# Altium PCB Glucometer-I.C.-Amp Test- V1.PcbDoc
Units mm, origin at the board's own origin, x right, y up, seen from the top; angles counter-clockwise.
Board outline 40.28 x 22.25 mm, 2 copper layers (Top Layer, Bottom Layer); 12 components, 13 nets, 54 pads, 7 vias.
Unrouted connection lines stored in the file: 11.
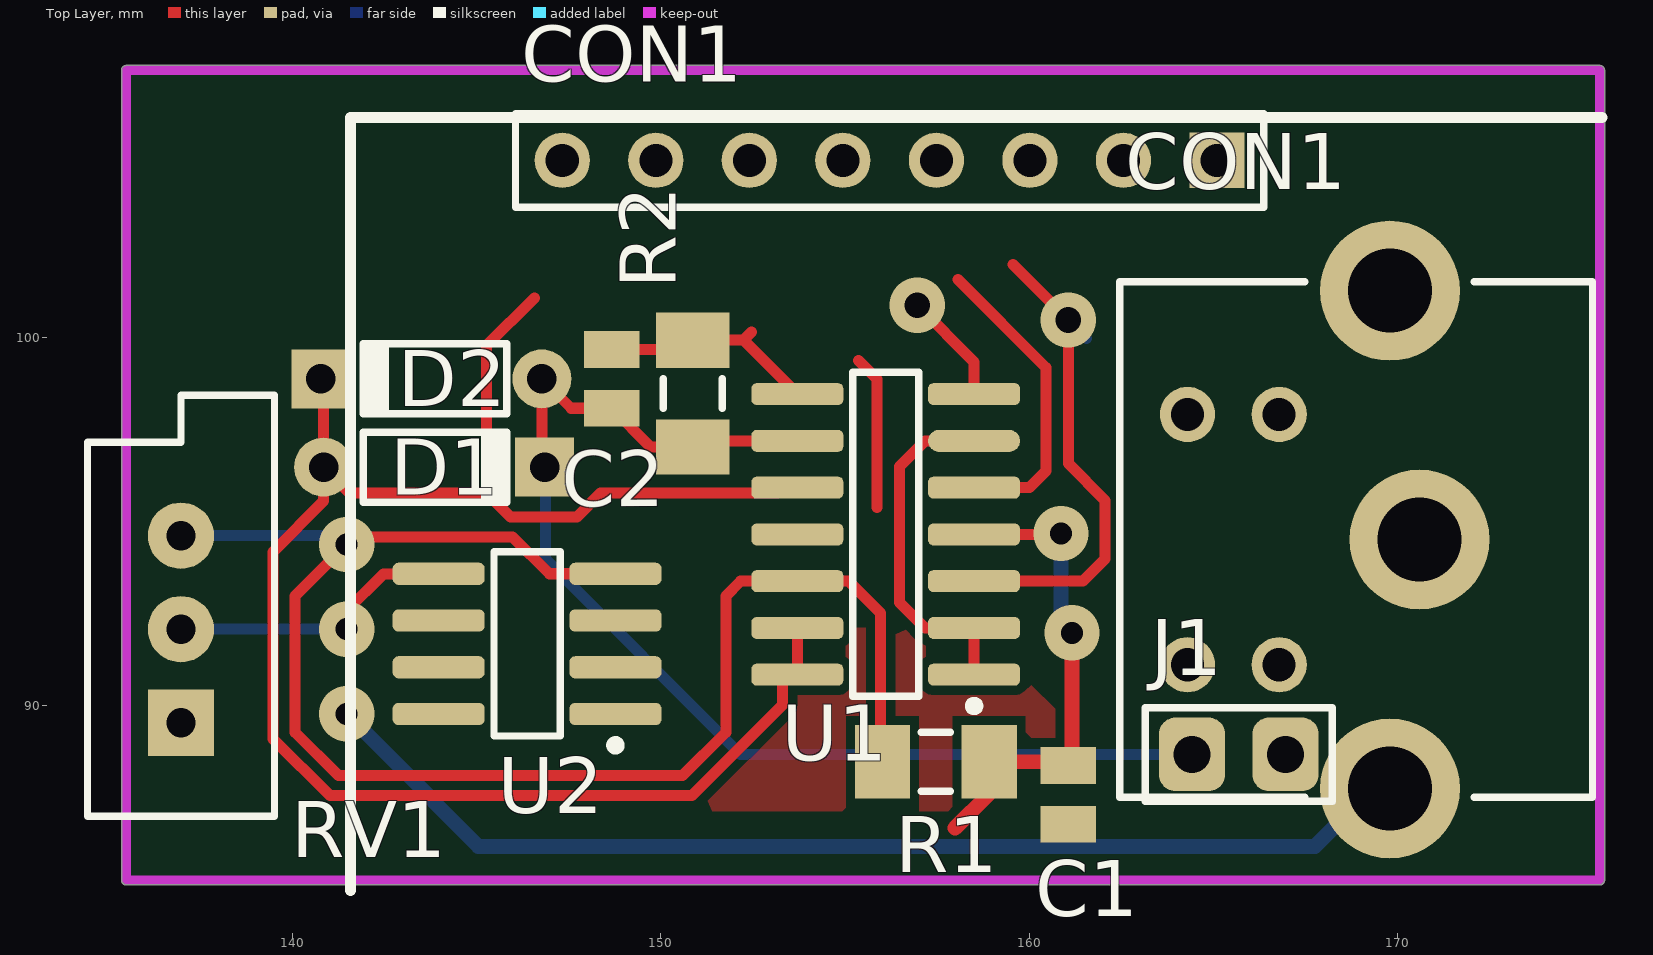
[diagram p0: Top Layer view]
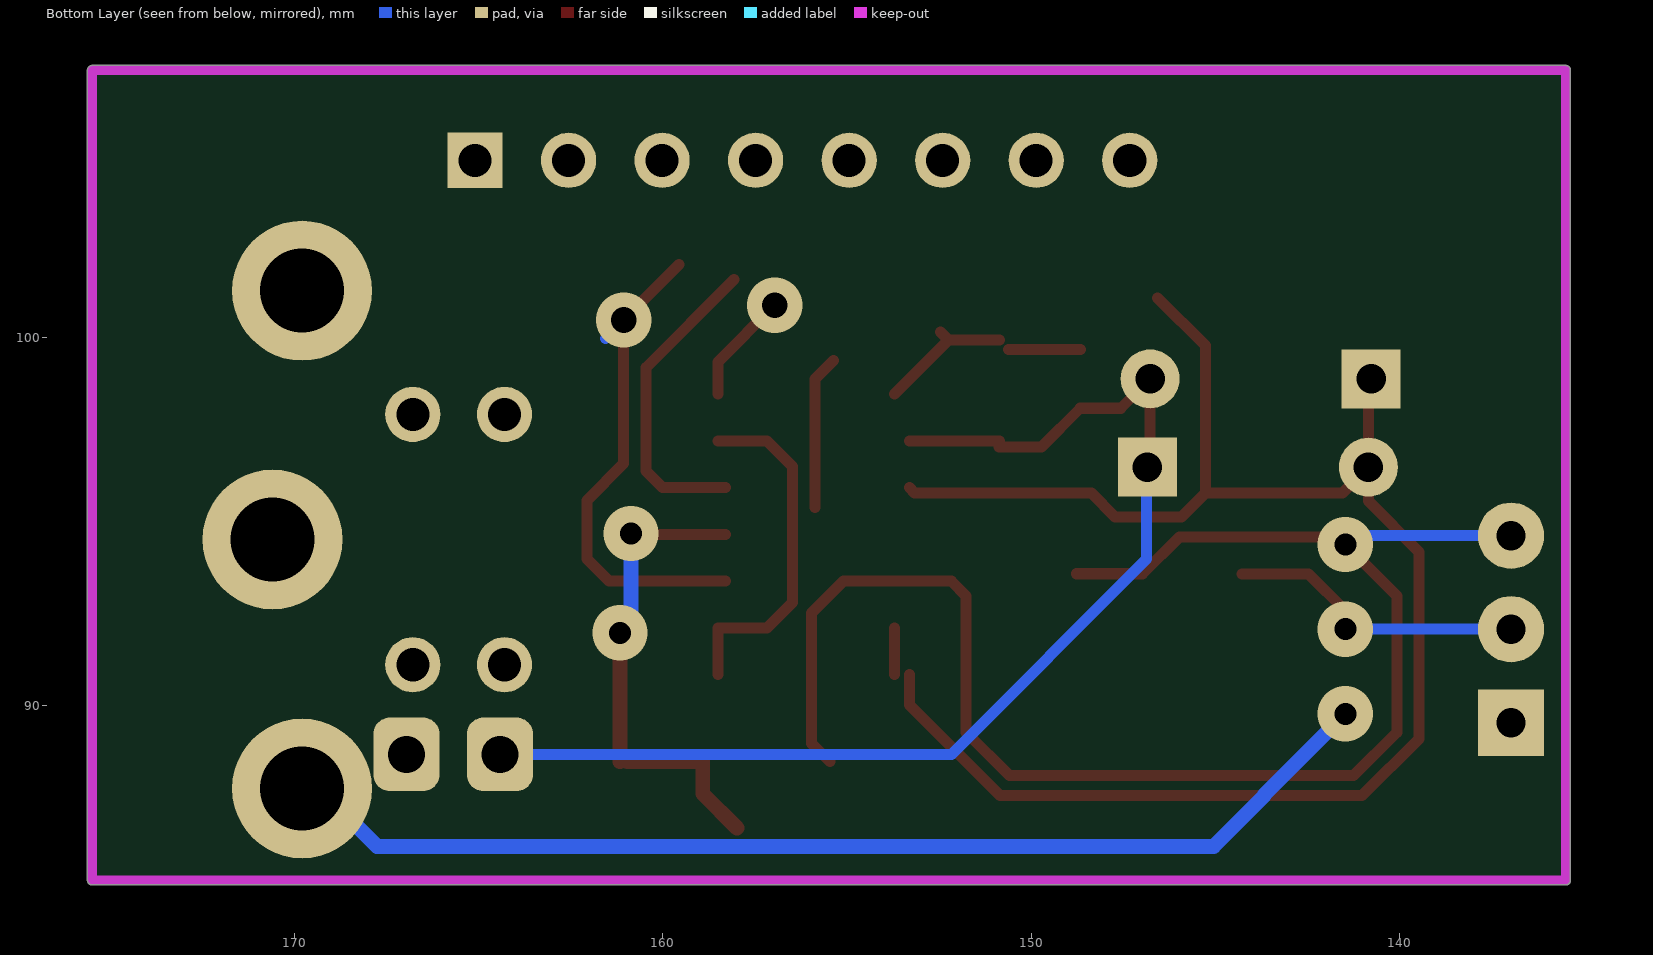
[diagram p1: Bottom Layer view, seen from below]

## Layer stack, top to bottom
Top Layer: signal copper 0.0356
Dielectric: dielectric 0.32, FR-4, Dk 4.8
Bottom Layer: signal copper 0.0356

## Board outline
135.348,85.25 ccw(c135.475,85.25) 135.475,85.123 175.5,85.123 ccw(c175.5,85.25) 175.627,85.25 175.627,107.25 ccw(c175.5,107.25) 175.5,107.377 135.475,107.377 ccw(c135.475,107.25) 135.348,107.25

## Design rules (kind name [scope] priority, off if disabled: settings)
AssemblyTestPointUsage AssemblyTestPointUsage_1 [All] p2:
AssemblyTestpoint AssemblyTestpoint_1 [All] p2: testpointundercomponent=TRUE minsize=1.016 maxsize=2.54 preferedsize=1.524 minholesize=0 maxholesize=1.016 preferedholesize=0.813 testpointgrid=0.025 usegrid=TRUE gridtolerance=0 allowsidetop=TRUE allowsidebottom=TRUE
Clearance [All] p1: gap=0.25
ComponentClearance ComponentClearance_1 [All] p2: gap=0.254 collisioncheckmode=3 verticalgap=0.254 showdistances=FALSE
DiffPairsRouting DiffPairsRouting_1 [All] p2: maxlimit=0.254 minlimit=0.254 mostfreqgap=0.254 maxuncoupledlength=12.7
FabricationTestPointUsage TestPointUsage [All] p2: valid=0 allowmultiple=FALSE
FabricationTestpoint Testpoint [All] p2: side=3 testpointundercomponent=TRUE minsize=1.016 maxsize=2.54 preferedsize=1.524 minholesize=0 maxholesize=1.016 preferedholesize=0.813 testpointgrid=0.025 allowsidetop=TRUE allowsidebottom=TRUE usegrid=TRUE gridtolerance=0
FanoutControl Fanout_LCC [IsLCC] p1: bgadir=Out bgaviamode=Centered fanoutstyle=Auto fanoutdirection=Alternating viagrid=0.025 // Fanout_LCC (Default Rule)
FanoutControl Fanout_BGA [IsBGA] p2: bgadir=Out bgaviamode=Centered fanoutstyle=Auto fanoutdirection=Alternating viagrid=0.025 // Fanout_BGA (Default Rule)
FanoutControl Fanout_Default [All] p4: bgadir=Out bgaviamode=Centered fanoutstyle=Auto fanoutdirection=Alternating viagrid=0.025 // Fanout_Default (Default Rule)
FanoutControl Fanout_Small [(CompPinCount < 5)] p5: bgadir=Out bgaviamode=Centered fanoutstyle=Auto fanoutdirection=OutThenIn viagrid=0.025 // Fanout_Small (Default Rule)
FanoutControl Fanout_BGA_1 [IsBGA] p6: bgadir=Out bgaviamode=Centered fanoutstyle=Auto fanoutdirection=Alternating viagrid=0.025 // Fanout_BGA (Default Rule)
FanoutControl Fanout_LCC_1 [IsLCC] p7: bgadir=Out bgaviamode=Centered fanoutstyle=Auto fanoutdirection=Alternating viagrid=0.025 // Fanout_LCC (Default Rule)
FanoutControl Fanout_SOIC_1 [IsSOIC] p8: bgadir=Out bgaviamode=Centered fanoutstyle=Auto fanoutdirection=Alternating viagrid=0.025 // Fanout_SOIC (Default Rule)
FanoutControl Fanout_Small_1 [(CompPinCount < 5)] p9: bgadir=Out bgaviamode=Centered fanoutstyle=Auto fanoutdirection=OutThenIn viagrid=0.025 // Fanout_Small (Default Rule)
FanoutControl Fanout_Default_1 [All] p10: bgadir=Out bgaviamode=Centered fanoutstyle=Auto fanoutdirection=Alternating viagrid=0.025 // Fanout_Default (Default Rule)
Height Height_1 [All] p2: minheight=0 maxheight=25.4 prefheight=12.7
HoleSize [All] p1: absolutevalues=TRUE maxlimit=5 minlimit=0.025 maxpercent=80.000 minpercent=20.000
HoleSize HoleSize_1 [All] p2: absolutevalues=TRUE maxlimit=5 minlimit=0.025 maxpercent=80.000 minpercent=20.000
HoleToHoleClearance HoleToHoleClearance_1 [All] p2: gap=0.254 allowstackedmicrovias=TRUE
LayerPairs LayerPairs_1 [All] p2: enforce=TRUE
MinimumSolderMaskSliver MinimumSolderMaskSliver_1 [All] p2: minsoldermaskwidth=0.254
NetAntennae NetAntennae_1 [All] p2: netantennaetolerance=0
PasteMaskExpansion PasteMaskExpansion_1 [All] p2: expansion=0
PlaneClearance PlaneClearance_1 [All] p2: clearance=0.508
PolygonConnect [All] p1: connectstyle=Relief reliefconductorwidth=0.254 reliefentries=4 polygonreliefangle="90 Angle" airgapwidth=0.254
PolygonConnect PolygonConnect_1 [All] p2: connectstyle=Relief reliefconductorwidth=0.254 reliefentries=4 polygonreliefangle="90 Angle" airgapwidth=0.254
RoutingPriority RoutingPriority_1 [All] p2: routingpriority=0
RoutingTopology RoutingTopology_1 [All] p2: topology=Shortest
RoutingVias [All] p1: holewidth=0.8 width=1.5 viastyle="Through Hole" minholewidth=0.7 minwidth=1 maxholewidth=1 maxwidth=2
ShortCircuit ShortCircuit_1 [All] p2: allowed=FALSE
SilkToSilkClearance SilkToSilkClearance_1 [All] p2: silktosilkclearance=0.254
SilkToSolderMaskClearance SilkscreenOverComponentPads [IsPad] p2: minsilkscreentomaskgap=0.254 clearancetoexposedcopper=TRUE
SolderMaskExpansion [All] p1: expansion=0.102
SolderMaskExpansion SolderMaskExpansion_1 [All] p2: expansion=0.102
UnRoutedNet UnRoutedNet_1 [All] p2:
Width [All] p1: maxlimit=5 minlimit=0.25 preferedwidth=0.3 minimp=50.000000 maximp=50.000000 favimp=50.000000
23 further rules are at their usual default settings.

## Classes and differential pairs
component class "Glucometer-I.C.-Amp Test- V1": C1 C2 D1 D2 J1 R1 R2 RV1 U1 U2

## Components (designator, comment, footprint, x,y, rotation, side; value= is the part's Value field where it differs from the comment)
C1 "Cap2" CAPC1608N 161.063,87.567 r270 top
C2 "Cap2" CAPC1608N 148.663,98.867 r90 top
CON1 "Header 8" HDR1X8 165.1,104.8 r180 top
CON1 "" CDIN2.6-3H4A 175.3,94.5 r180 top
D1 "1N4148" DO-35#1 143.863,96.467 r0 top
D2 "1N4148" DO-35#2 143.863,98.867 r180 top
J1 "Header 2" HDR1X2 166.963,88.667 r180 top
R1 "Res1" RESC3216N 157.463,88.467 r0 top
R2 "Res1" RESC3216N 150.863,98.467 r270 top
RV1 "RPot" VR5 136.963,92.067 r90 top
U1 "LMC6044IN" M14A_N 156.104,94.641 r180 top
U2 "LM385BM" M08A_N 146.363,91.667 r180 top

## Footprints (in the part's own frame and the unit in brackets; to place one, negate y for a bottom-side part, rotate by r counter-clockwise, add the part's x,y. Pads: shape width x height; smd on the part's side, far side on the other; paste and mask are expansions set on the pad)
CAPC1608N [mm] "Chip Capacitor, Body 1.6x0.8mm, IPC Medium Density"
  rect 1x1.5 smd: 1(-0.8,0) 2(0.8,0)
  body extent -0.87,-0.48 0.87,0.48, height 0.85
CDIN2.6-3H4A [mm] "Connector; Circular DIN, Thru-Hole; 4 Position; Right Angle; Pitch 2.1/2.6 mm; Body 14 x 12.84 x 13 mm (WxTxH), Shielded, Special PCB Retention"
  round 1.5 hole 0.9: 1(8.51,-3.4) 2(8.51,3.4) 3(11,-3.4) 4(11,3.4)
  round 3.8 hole 2.28: MH1(5.5,-6.76) MH2(4.7,0) MH3(5.5,6.76)
  silkscreen extent 0,-7 12.84,7, body extent 0,-7 12.84,7, height 13
DO-35#1 [mm] "Diode, Axial; Body 3.8 x 1.9 mm (LxDia. max), Lead Dia. 0.53 mm (max)"
  round 1.6 hole 0.8: 1(-3.025,0)
  rect 1.6x1.6 hole 0.8: 2(2.975,0)
  silkscreen extent -1.95,-0.95 2.05,0.95
DO-35#2 [mm] "Diode, Axial; Body 3.8 x 1.9 mm (LxDia. max), Lead Dia. 0.53 mm (max)"
  round 1.6 hole 0.8: 1(-2.9,0)
  rect 1.6x1.6 hole 0.8: 2(3.1,0)
  silkscreen extent -1.95,-0.95 2.05,0.95
HDR1X2 [mm] "Connector; Header; 2 Position"
  rrect50% 1.8x2 hole 1: 1(0,0) 2(2.54,0)
  silkscreen extent -1.27,-1.27 3.81,1.27
HDR1X8 [mm] "Connector; Header; 8 Position"
  rect 1.5x1.5 hole 0.9: 1(0,0)
  round 1.5 hole 0.9: 2(2.54,0) 3(5.08,0) 4(7.62,0) 5(10.16,0) 6(12.7,0) 7(15.24,0) 8(17.78,0)
  silkscreen extent -1.27,-1.27 19.05,1.27
M08A_N [mm] "SOIC, 8-Leads, Body 4.9x3.9mm, Pitch 1.27mm, IPC Medium Density"
  rrect50% 2.5x0.6 smd: 1(-2.4,1.905) 2(-2.4,0.635) 3(-2.4,-0.635) 4(-2.4,-1.905) 5(2.4,-1.905) 6(2.4,-0.635) 7(2.4,0.635) 8(2.4,1.905)
  silkscreen extent -2.53,-2.5 0.9,2.88, body extent -2,-2.5 2,2.5, height 1.75
M14A_N [mm] "SOIC, 14-Leads, Body 8.6x3.9mm, Pitch 1.27mm, IPC Medium Density"
  rrect50% 2.5x0.6 smd: 1(-2.4,3.81) 2(-2.4,2.54) 3(-2.4,1.27) 4(-2.4,0) 5(-2.4,-1.27) 7(-2.4,-3.81) 8(2.4,-3.81) 9(2.4,-2.54) 10(2.4,-1.27) 11(2.4,0) 12(2.4,1.27) 13(2.4,2.54) 14(2.4,3.81)
  oval 2.5x0.6 smd: 6(-2.4,-2.54)
  silkscreen extent -2.53,-4.4 0.9,4.78, body extent -2,-4.38 2,4.38, height 1.75
RESC3216N [mm] "Chip Resistor, Body 3.2x1.6mm, IPC Medium Density"
  rect 1.5x2 smd: 1(-1.45,0) 2(1.45,0)
  silkscreen extent -0.4,-0.8 0.4,0.8, body extent -1.68,-0.87 1.68,0.87, height 0.71
VR5 [mm] "Thru-Hole; 3 Leads"
  rect 1.8x1.8 hole 0.8: 1(-2.54,0)
  round 1.8 hole 0.8: 2(0,0) 3(2.54,0)
  silkscreen extent -5.08,-2.54 6.35,2.54

## Part data
C1 C2: "Capacitor"
CON1: "Header, 8-Pin"
CON1: library part "MiniDin 4Pins - SuperVideo", "MiniDin 4 Pins"
D1 D2: "High Conductance Fast Diode"
J1: "Header, 2-Pin"
R1 R2: "Resistor"
RV1: "Potentiometer"
U1: "CMOS Quad Micropower Operational Amplifier, 14-pin MDIP"
U2: "Adjustable Micropower Voltage Reference, 8-pin Narrow SOIC"

## Via types
v1: diameter 1.5, hole 0.6, Top Layer to Bottom Layer, 5 vias
v2: diameter 1.5, hole 0.7, Top Layer to Bottom Layer, 2 vias

## Nets (pads, with @x,y where several pads share a name; then routed paths per layer and width w, separated by ;. In a path a pad name is that pad's centre, name@x,y a point inside that pad or via, vN(x,y) a via of type N, cw(c..) or ccw(c..) an arc to the next point about the centre after c; other vN are vias at no path point)
3.3V: C1.1 R1.2 U1.4 | length 13.8
  Top Layer w0.3: U1.4@158.304,94.641 v1@160.837,94.641
  Top Layer w0.4: 157.986,86.667 158.913,87.594 R1.2 C1.1@160.963,88.467 ; v1@160.837,94.641 v1(160.863,94.667) ; C1.1@161.163,88.467 161.163,91.467 161.663,91.967 v1(161.163,91.967)
  Bottom Layer w0.4: v1(160.863,94.667) 160.863,92.267 v1(161.163,91.967)
CNT: CON1.3@160.02,104.8 CON1.7 U1.7 | length 3.1
  Top Layer w0.3: v2(156.963,100.867) 158.504,99.326 U1.7
GND: C1.2 CON1.8 RV1.1 U1.11 U2.8
NetR1_1: R1.1 RV1.3 U1.12 U2.4 | length 42.7
  Top Layer w0.3: U2.4 146.968,93.572 145.973,94.567 141.663,94.567 v1(141.463,94.367) 140.063,92.967 140.063,89.267 141.236,88.094 150.59,88.094 151.763,89.267 151.763,92.967 152.167,93.371 U1.12 155.099,93.371 155.963,92.507 155.963,88.967 R1.1@155.463,88.467
  Bottom Layer w0.3: RV1.3@137.663,94.607 141.223,94.607 v1(141.463,94.367)
NetRV1_3: RV1.2 U2.5 | length 7.5
  Top Layer w0.3: v1(141.463,92.067) 141.463,92.567 142.463,93.567 U2.5@144.263,93.567
  Bottom Layer w0.3: RV1.2@137.663,92.067 v1(141.463,92.067)
NetU1_1: U1.1 U1.2 U1.6 | length 9.6
  Top Layer w0.3: U1.1 U1.2 157.169,92.101 156.479,92.791 156.479,96.491 157.169,97.181 U1.6
REF: CON1.1@165.1,104.8 CON1.4@157.48,104.8 U1.3 | length 13.7
  Top Layer w0.3: U1.3@158.304,93.371 U1.3 161.467,93.371 162.063,93.967 162.063,95.567 161.063,96.567 v2(161.063,100.467) 159.563,101.967
  Bottom Layer w0.3: v2(161.063,100.467) v2@161.563,99.967
VCC: CON1.5
VCTRL: CON1.6 U1.5 | length 8.5
  Top Layer w0.3: 158.063,101.567 160.463,99.167 160.463,96.367 160.007,95.911 U1.5@158.304,95.911
VGND: D1.1 D2.2 U1.10 U1.13 U1.14 | length 47.1
  Top Layer w0.3: D2.2@140.838,98.792 D1.1 ; 146.563,101.067 145.263,99.767 145.263,95.767 ; U1.14@153.304,90.831 153.304,90.008 150.84,87.544 141.008,87.544 139.463,89.089 139.463,94.167 140.838,95.542 D1.1 ; U1.10@153.304,95.911 153.16,95.767 148.363,95.767 147.713,95.117 145.913,95.117 145.263,95.767 ; U1.14 U1.13 ; D1.1 141.538,95.767 145.263,95.767
VOUT: C2.2 R2.1 U1.8 | length 5.7
  Top Layer w0.3: C2.2 R2.1@150.613,99.667 ; R2.1 152.238,99.917 ; 152.463,100.142 152.238,99.917 ; U1.8 152.238,99.917
WRK: CON1.2 J1.1
WRKIN: C2.1 D1.2 D2.1 J1.2 R2.2 U1.9 | length 30.4
  Top Layer w0.3: D1.2@146.763,97.242 146.763,98.067 ; D2.1 147.563,98.067 C2.1 149.713,97.017 R2.2 ; R2.2@150.863,97.181 U1.9@153.304,97.181
  Bottom Layer w0.3: D1.2@146.863,96.467 146.863,93.967 152.163,88.667 J1.2
pads on no net: CON1.1@166.79,97.9 CON1.3@164.3,97.9 CON1.4@164.3,91.1 CON1.MH1 CON1.MH2 CON1.MH3 U2.1 U2.2 U2.3 U2.6 U2.7
copper on no net: | length 35.2
  Top Layer w0.3: 155.363,99.367 155.863,98.867 155.863,95.367
  Bottom Layer w0.4: v1(141.463,89.767) 143.663,87.567 ; 143.663,87.544 145.04,86.167 167.763,86.167 170.027,88.431

## Polygon pours and split planes (outlines as drawn)
no net on Top Layer "Bottom Layer-No Net" (solid, pour order 20): 150.863,86.667 150.863,87.521 150.84,87.544 153.704,90.408 153.704,92.101 158.504,92.101 161.063,89.542 161.063,88.367 159.363,86.667

## Keep-outs
Keep-Out Layer:
  lines w0.254: 135.475,85.25 135.475,107.25 175.5,107.25 175.5,85.25 135.475,85.25

## Silkscreen, mask and mechanical layers (free items; w line width, h text height)
Top Overlay:
  lines w0.3: 141.563,84.967 141.563,105.967 175.563,105.967
Mechanical 16:
  lines w0.127: 0,53.975 5.08,53.975 ; 0,107.95 5.08,107.95 ; 0,161.925 5.08,161.925 ; 69.85,0 69.85,5.08 ; 69.85,210.82 69.85,215.9 ; 139.7,0 139.7,5.08 ; 139.7,210.82 139.7,215.9 ; 209.55,0 209.55,5.08 ; 209.55,210.82 209.55,215.9 ; 274.32,53.975 279.4,53.975 ; 274.32,107.95 279.4,107.95 ; 274.32,161.925 279.4,161.925 ; 0,0 279.4,0 279.4,215.9 0,215.9 0,0 ; 5.08,5.08 5.08,210.82 274.32,210.82 274.32,5.08 5.08,5.08
  text "1" at 34.324,212.471 h1.78
  text "2" at 104.191,212.471 h1.78
  text "3" at 173.914,212.471 h1.78
  text "4" at 243.789,212.471 h1.78
  text "A" at 1.905,186.614 h1.78
  text "A" at 276.225,186.614 h1.78
  text "B" at 1.905,132.639 h1.78
  text "B" at 276.225,132.639 h1.78
  text "C" at 1.905,78.664 h1.78
  text "C" at 276.225,78.664 h1.78
  text "D" at 1.905,24.816 h1.78
  text "D" at 276.225,24.816 h1.78
  text "1" at 34.324,1.651 h1.78
  text "2" at 104.191,1.651 h1.78
  text "3" at 173.914,1.651 h1.78
  text "4" at 243.789,1.651 h1.78

## Dimensions
135.475,107.25 to 175.5,107.25 on Keep-Out Layer

## Text inside footprints (layer, text, board x,y; h text height)
CON1: Mechanical 1 "PCB Edge" at 174.7,101.2 h0.25 r270